# Altium PCB S100 Memory Dumper.PcbDoc
Units mil, origin at the board's own origin, x right, y up, seen from the top; angles counter-clockwise.
Board outline 10000 x 5300 mil, 2 copper layers (Top Layer, Bottom Layer); 52 components, 90 nets, 387 pads, 296 vias.
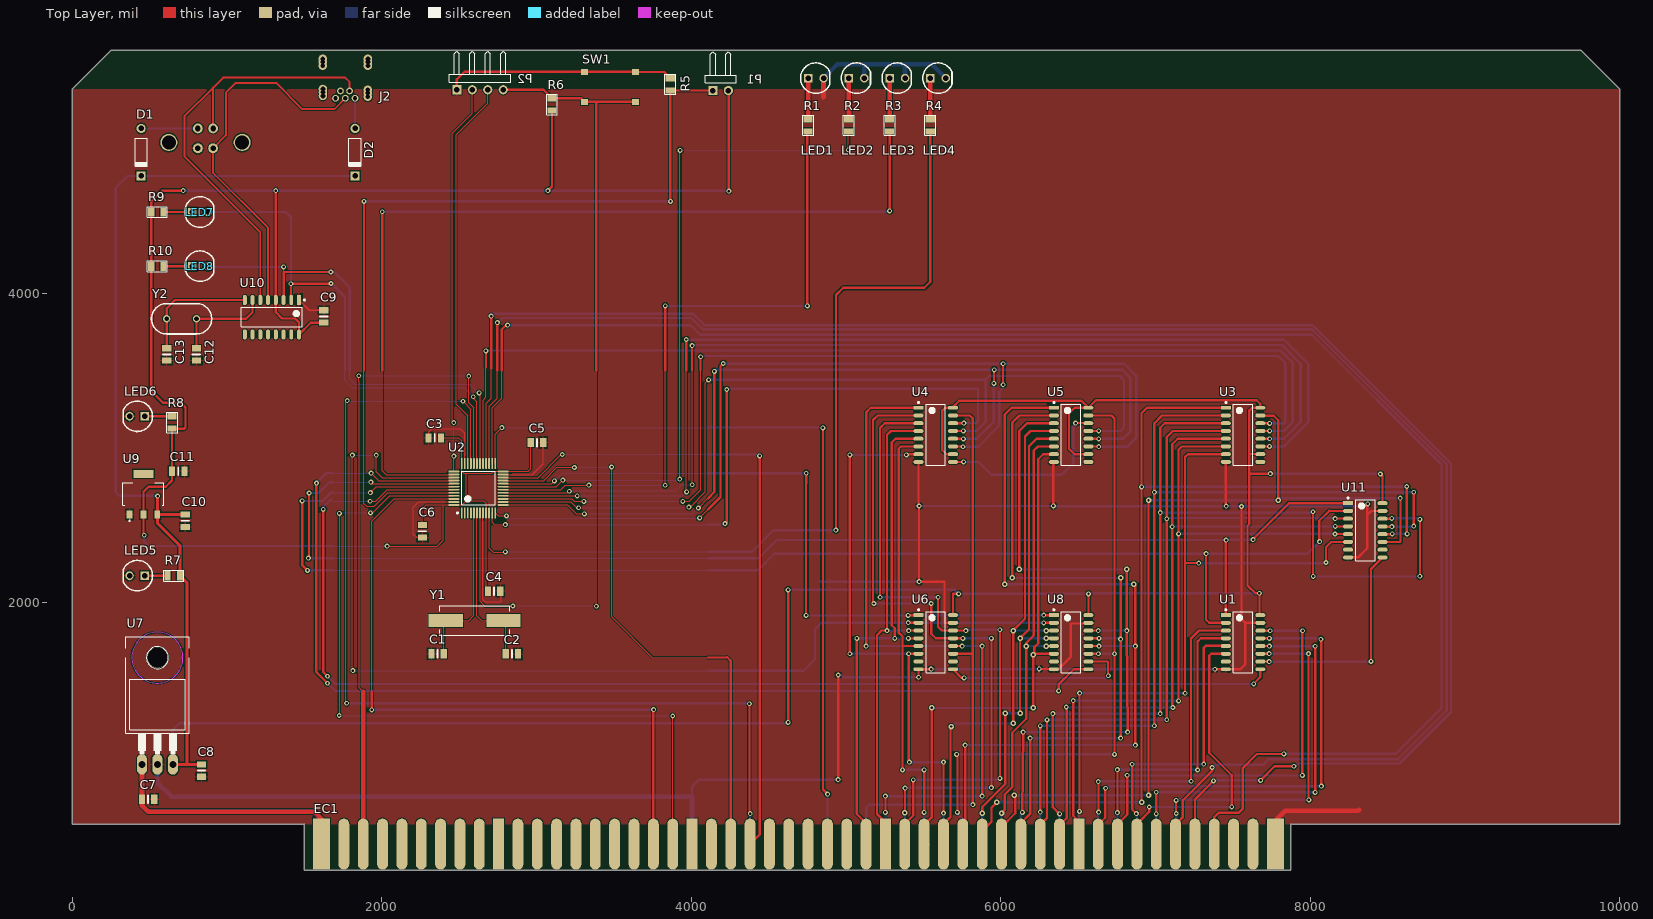
[diagram p0: Top Layer view]
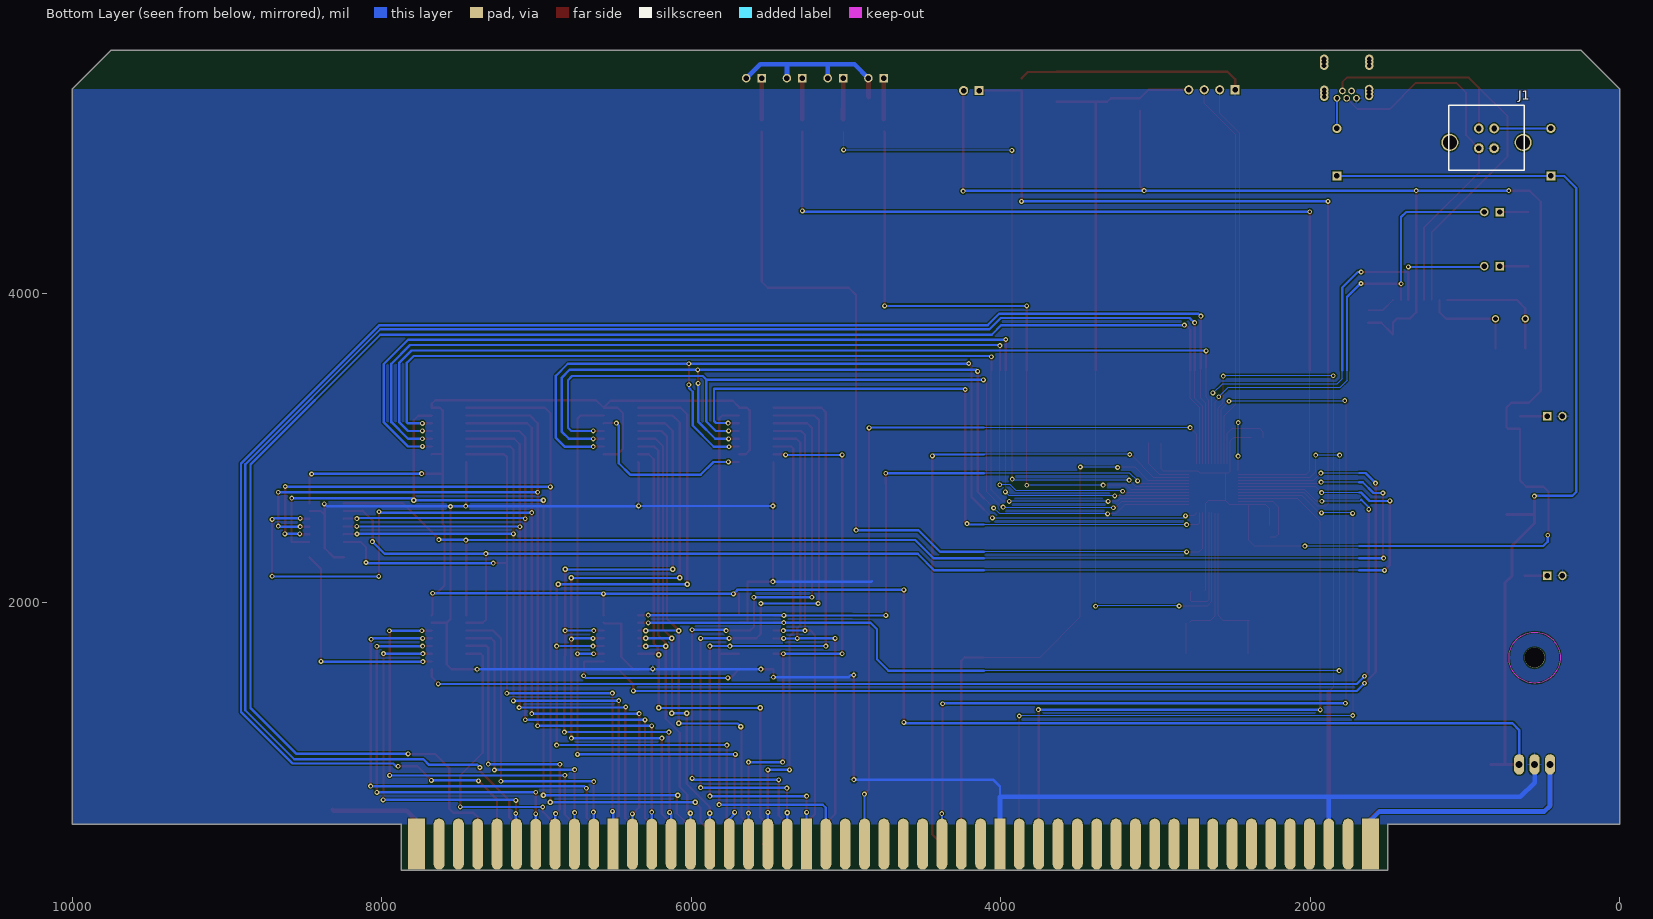
[diagram p1: Bottom Layer view, seen from below]
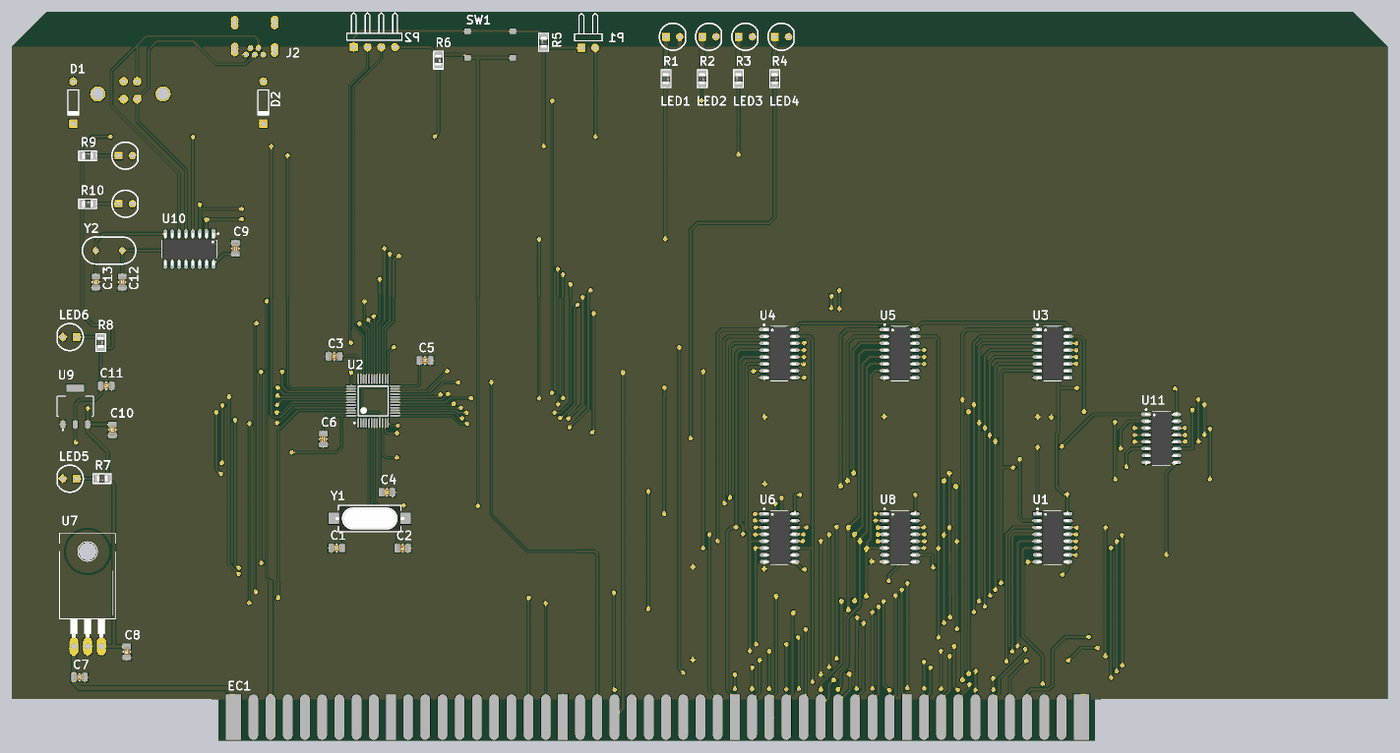
[diagram p2: 3D render of the assembled board from above, using the file's embedded part models]

## Layer stack, top to bottom
Top Solder: solder mask 0.4, Solder Resist, Dk 3.5
Top Layer: signal copper 1.4
Dielectric 1: dielectric 12.6, FR-4, Dk 4.8
Bottom Layer: signal copper 1.4
Bottom Solder: solder mask 0.4, Solder Resist, Dk 3.5

## Board outline
0,570 1500,570 1500,270 7875,270 7875,570 10000,570 10000,5320 9750,5570 250,5570 0,5320

## Design rules (kind name [scope] priority, off if disabled: settings)
Clearance [All] p1: gap=8 ignorepadtopadclearanceinfootprint=TRUE
PolygonConnect [All] p1: connectstyle=Relief reliefconductorwidth=10 reliefentries=4 polygonreliefangle="90 Angle" airgapwidth=10
RoomDefinition MCU [False] p1: confinementstyle=ConfineIn formatcopy=TRUE lockcomponents=FALSE outline 1685,3502 4108,3502 4108,1424 1685,1424
RoutingVias [All] p1: holewidth=15.75 width=31.5 viastyle="Through Hole" minholewidth=11.81 minwidth=19.68 maxholewidth=78.74 maxwidth=50
SolderMaskExpansion [All] p1: expansion=4
Width "MCU Width" [WithinRoom('MCU')] p1: maxlimit=8 minlimit=6 preferedwidth=8
Width [All] p2: maxlimit=50 minlimit=8 preferedwidth=30
30 further rules are at their usual default settings.

## Components (designator, comment, footprint, x,y, rotation, side; value= is the part's Value field where it differs from the comment)
C1 "22pF" SMD-0805C 2360.73,1670 r270 top
C2 "22pF" SMD-0805C 2840.73,1669.33 r90 top
C3 "0.10µF" SMD-0805C 2342,3065 r270 top value=0.10μF
C4 "0.10µF" SMD-0805C 2726,2075 r90 top value=0.10μF
C5 "0.10µF" SMD-0805C 3003,3035 r90 top value=0.10μF
C6 "0.10µF" SMD-0805C 2263,2462 r0 top value=0.10μF
C7 "1µF" SMD-0805C 490,730 r90 top value=1μF
C8 "1µF" SMD-0805C 835,915 r0 top value=1μF
C9 "0.10µF" SMD-0805C 1625,3850 r180 top value=0.10μF
C10 "1µF" SMD-0805C 730,2530 r0 top value=1μF
C11 "1µF" SMD-0805C 684.84,2850 r90 top value=1μF
C12 "22pF" SMD-0805C 802.13,3605 r0 top
C13 "22pF" SMD-0805C 610,3605 r0 top
D1 "Diode 1N4149" DO-35A 445,4911.46 r270 top
D2 "Diode 1N4149" DO-35A 1827.32,4911.46 r270 top
EC1 "S100 Connector" S100 1610,440 r0 top locked
J1 "USB B" "USB B V" 860.79,5065 r180 bottom
J2 "USB Mini B" "USB Mini B" 1764.33,5260 r0 top
LED1 "Generic LED 5mm" "LED 5mm THT" 4805,5390 r0 top
LED2 "Generic LED 5mm" "LED 5mm THT" 5068.33,5390 r0 top
LED3 "Generic LED 5mm" "LED 5mm THT" 5331.67,5390 r0 top
LED4 "Generic LED 5mm" "LED 5mm THT" 5595,5390 r0 top
LED5 "Generic LED 5mm" "LED 5mm THT" 419.69,2175 r180 top
LED6 "Generic LED 5mm" "LED 5mm THT" 419.69,3205 r180 top
LED7 "Generic LED 5mm" "LED 5mm THT" 825,4525 r0 top
LED8 "Generic LED 5mm" "LED 5mm THT" 825,4175 r0 top
P1 "Header 2H" HDR1X2H 4140,5310 r0 top
P2 "Header 4H" HDR1X4H 2485,5315 r0 top
R1 "330" SMD-0805-RES 4755,5085 r180 top
R2 "330" SMD-0805-RES 5018.33,5085 r180 top
R3 "330" SMD-0805-RES 5281.67,5085 r0 top
R4 "330" SMD-0805-RES 5545,5085 r180 top
R5 "10k" SMD-0805-RES 3865,5350 r0 top
R6 "1k" SMD-0805-RES 3100,5220 r180 top
R7 "680" SMD-0805-RES 655,2175 r90 top
R8 "330" SMD-0805-RES 644.84,3165 r180 top
R9 "330" SMD-0805-RES 550,4525 r270 top
R10 "330" SMD-0805-RES 550,4175 r270 top
SW1 "Button" SMD_PUSHBUTTON_LCSC 3640,5237.09 r180 top
U1 "74HC165" SOIC-175-16 7566.22,1745 r0 top
U2 "STM32F103C8T6" STM-LQFP48_N 2625,2740 r90 top
U3 "74HC595" SOIC-175-16 7566.22,3085 r0 top
U4 "74HC595" SOIC-175-16 5580,3085 r0 top
U5 "74HC595" SOIC-175-16 6455,3085 r0 top
U6 "74HC165" SOIC-175-16 5580,1745 r0 top
U7 "LM7805" LM7805-TO220 550,1205 r0 top
U8 "74HC165" SOIC-175-16 6455,1745 r0 top
U9 "AMS1117-3.3" AMS1117-3.3-SOT23 459.84,2701.69 r0 top
U10 "CH340G" SOIC-175-16 1290,3845 r270 top
U11 "74HC165" SOIC-175-16 8356,2468 r0 top
Y1 "=VALUE" "ABRACON ABLS" 2600.73,1885 r180 top
Y2 "=VALUE" THT_Crystal 802.13,3835 r180 top

## Footprints (in the part's own frame and the unit in brackets; to place one, negate y for a bottom-side part, rotate by r counter-clockwise, add the part's x,y. Pads: shape width x height; smd on the part's side, far side on the other; paste and mask are expansions set on the pad)
"ABRACON ABLS" [mm] "Crystal, 2-Leads, Body 4.70x11.40mm, Pitch 8.80mm, IPC Medium Density"
  rect 5.6x2.1 smd: 1(-4.75,0) 2(4.75,0)
  silkscreen extent -5.77,-2.42 5.78,2.42, body extent -6.35,-2.35 6.35,2.35, height 4.2
AMS1117-3.3-SOT23 [mm]
  rect 0.93x1.31 smd: 1(-2.29,-3.345) 2(0,-3.345) 3(2.29,-3.345)
  rect 3.24x1.31 smd: 4(0,3.345)
  silkscreen extent -3.36,-4.47 3.36,1.86
DO-35A [mm] "Diode, Axial; Body 4.6 x 1.9 mm (LxDia. max), Lead Dia. 0.53 mm (max)"
  round 1.5 hole 0.9: 1(-3.9,0)
  rect 1.5x1.5 hole 0.9: 2(3.9,0)
  silkscreen extent -2.3,-1 2.4,1
HDR1X2H [mm] "Connector; Header; 2 Position; Right Angle"
  rect 1.5x1.5 hole 0.9: 1(0,0)
  round 1.5 hole 0.9: 2(2.54,0)
  silkscreen extent -1.27,1.27 3.81,6.35
HDR1X4H [mm] "Connector; Header; 4 Position; Right Angle"
  rect 1.5x1.5 hole 0.9: 1(0,0)
  round 1.5 hole 0.9: 2(2.54,0) 3(5.08,0) 4(7.62,0)
  silkscreen extent -1.27,1.27 8.89,6.35
"LED 5mm THT" [mil]
  rect 55x55 hole 35.43: 1(-50,0)
  round 55 hole 35.43: 2(50,0)
  silkscreen extent -99,-99 90,99
LM7805-TO220 [mil]
  oval 66x132 hole 44: 1(-100,-250) 2(0,-250) 3(100,-250)
  round 130 hole 130 unplated: None(0,440)
  Keep-Out Layer circle w0: c0,440 r165
  Keep-Out Layer circle w0: c0,440 r165
  Keep-Out Layer circle w0: c0,440 r165
  Keep-Out Layer circle w0: c0,440 r165
  Keep-Out Layer circle w0: c0,440 r165
  Keep-Out Layer circle w0: c0,440 r165
  silkscreen extent -205,-185 205,575
S100 [mil]
  rect 110x330 smd: 1(0,0) 50(6165,0)
  oval 70x330 smd: 2(145,0) 3(270,0) 4(395,0) 5(520,0) 6(645,0) 7(770,0) 8(895,0) 9(1020,0) 11(1270,0) 12(1395,0) 13(1520,0) 14(1645,0) 15(1770,0) 16(1895,0) 17(2020,0) 18(2145,0) 19(2270,0) 21(2520,0) 22(2645,0) 23(2770,0) 24(2895,0) 25(3020,0) 26(3145,0) 27(3270,0) 28(3395,0) 29(3520,0) 31(3770,0) 32(3895,0) 33(4020,0) 34(4145,0) 35(4270,0) 36(4395,0) 37(4520,0) 38(4645,0) 39(4770,0) 41(5020,0) 42(5145,0) 43(5270,0) 44(5395,0) 45(5520,0) 46(5645,0) 47(5770,0) 48(5895,0) 49(6020,0)
  rect 70x330 smd: 10(1145,0) 20(2395,0) 30(3645,0) 40(4895,0)
  rect 110x330 smd far side: 51(0,0) 100(6165,0)
  oval 70x330 smd far side: 52(145,0) 53(270,0) 54(395,0) 55(520,0) 56(645,0) 57(770,0) 58(895,0) 59(1020,0) 61(1270,0) 62(1395,0) 63(1520,0) 64(1645,0) 65(1770,0) 66(1895,0) 67(2020,0) 68(2145,0) 69(2270,0) 71(2520,0) 72(2645,0) 73(2770,0) 74(2895,0) 75(3020,0) 76(3145,0) 77(3270,0) 78(3395,0) 79(3520,0) 81(3770,0) 82(3895,0) 83(4020,0) 84(4145,0) 85(4270,0) 86(4395,0) 87(4520,0) 88(4645,0) 89(4770,0) 91(5020,0) 92(5145,0) 93(5270,0) 94(5395,0) 95(5520,0) 96(5645,0) 97(5770,0) 98(5895,0) 99(6020,0)
  rect 70x330 smd far side: 60(1145,0) 70(2395,0) 80(3645,0) 90(4895,0)
SMD-0805-RES [mil]
  rect 60x40 smd: 1(0,40) 2(0,-40)
  silkscreen extent -35,-65 35,65, body extent -24,-39 26,39, height 31
SMD-0805C [mil]
  rect 60x40 smd: 1(0,40) 2(0,-40)
  silkscreen extent -25,0 25,0, body extent -25,-39 25,39, height 35
SMD_PUSHBUTTON_LCSC [mm]
  rect 1.15x1 smd: 1(0,0) 1(8.35,0) 2(0,-4.9) 2(8.35,-4.9)
SOIC-175-16 [mm] "SOIC, 16-Leads, Body 9.90x3.90mm, Pitch 1.27mm, IPC Low Density"
  rect 1.65x0.65 smd: 1(-2.825,4.445)
  oval 1.65x0.65 smd: 2(-2.825,3.175) 3(-2.825,1.905) 4(-2.825,0.635) 5(-2.825,-0.635) 6(-2.825,-1.905) 7(-2.825,-3.175) 8(-2.825,-4.445) 9(2.825,-4.445) 10(2.825,-3.175) 11(2.825,-1.905) 12(2.825,-0.635) 13(2.825,0.635) 14(2.825,1.905) 15(2.825,3.175) 16(2.825,4.445)
  silkscreen extent -2.95,-5 1.6,5.44, body extent -3,-5 3,5, height 1.75
STM-LQFP48_N [mm] "QFP, 48-Leads, Body 7x7mm, Pitch 0.5mm, IPC Medium Density"
  oval 1.8x0.3 smd: 1(-4.05,2.75) 2(-4.05,2.25) 3(-4.05,1.75) 4(-4.05,1.25) 5(-4.05,0.75) 6(-4.05,0.25) 7(-4.05,-0.25) 8(-4.05,-0.75) 9(-4.05,-1.25) 10(-4.05,-1.75) 11(-4.05,-2.25) 12(-4.05,-2.75) 25(4.05,-2.75) 26(4.05,-2.25) 27(4.05,-1.75) 28(4.05,-1.25) 29(4.05,-0.75) 30(4.05,-0.25) 31(4.05,0.25) 32(4.05,0.75) 33(4.05,1.25) 34(4.05,1.75) 35(4.05,2.25) 36(4.05,2.75)
  oval 0.3x1.8 smd: 13(-2.75,-4.05) 14(-2.25,-4.05) 15(-1.75,-4.05) 16(-1.25,-4.05) 17(-0.75,-4.05) 18(-0.25,-4.05) 19(0.25,-4.05) 20(0.75,-4.05) 21(1.25,-4.05) 22(1.75,-4.05) 23(2.25,-4.05) 24(2.75,-4.05) 37(2.75,4.05) 38(2.25,4.05) 39(1.75,4.05) 40(1.25,4.05) 41(0.75,4.05) 42(0.25,4.05) 43(-0.25,4.05) 44(-0.75,4.05) 45(-1.25,4.05) 46(-1.75,4.05) 47(-2.25,4.05) 48(-2.75,4.05)
  silkscreen extent -4.17,-2.75 2.75,3.57, body extent -3.5,-3.5 3.5,3.5, height 1.6
THT_Crystal [mm]
  round 1.2 hole 0.8: 1(0,0) 2(4.88,0)
  silkscreen extent -2.5,-2.5 7.38,2.5
"USB B V" [mm]
  round 1.6 hole 0.92: 1(1.25,0) 2(-1.25,0) 3(-1.25,-3.25) 4(1.25,-3.25)
  round 2.8 hole 2.3: 5(-6.02,-2.3) 5(6.02,-2.3)
  silkscreen extent -6.22,-6.86 6.22,3.81
"USB Mini B" [mm]
  round 1.1 hole 0.7: 1(1.6,0) 2(0.7,1.2) 3(0,0) 4(-0.8,1.2) 5(-1.6,0)
  round 1.4 hole 0.8: 6(-3.7,5.334) 6(-3.7,5.95) 6(-3.7,6.477) 6(-3.683,0.381) 6(-3.683,0.997) 6(-3.683,1.524) 6(3.683,0.254) 6(3.683,0.87) 6(3.683,1.397) 6(3.7,5.334) 6(3.7,5.95) 6(3.7,6.477)

## Part data
C1 C2 C12 C13: library part GQM2195C1H220GB01D, "CAP CER 22PF 50V NP0 0805", Digi-Key Part Number=490-6097-1-ND, Manufacturer="Murata Electronics North America", Operating Temperature="-55°C ~ 125°", Package / Case="0805 (2012 Metric)", Ratings=-, Temperature Coefficient="C0G, NP0", Tolerance=±2%, Voltage=50V, @ qty=0, Applications="RF, Microwave, High Frequency", Datasheets=http://www.murata.com/~/media/webrenewal/support/library/catalog/products/capacitor/mlcc/c02e.pdf, Factory Stock=0, Features="High Q, Low Loss", Height - Seated (Max)=-, Image=//media.digikey.com/Renders/Murata%20Renders/0805(GxM9).jpg, Lead Spacing=-, Lead Style=-, Minimum Quantity=1, Mounting Type="Surface Mount, MLCC", Packaging="Cut Tape (CT)", Part Number=GQM2195C1H220GB01D, Part Status=Active, Quantity Available=2356, Series=GQM, Size / Dimension="0.079\" L x 0.049\" W (2.00mm x 1.25mm)", Thickness (Max)="0.037\" (0.95mm)", Unit Price (USD)=1.26
C3 C4 C5 C6 C9: library part GCD21BR71H104KA01L, "CAP CER 0.1UF 50V X7R 0805", Digi-Key Part Number=490-11955-1-ND, Manufacturer="Murata Electronics North America", Operating Temperature="-55°C ~ 125°", Package / Case="0805 (2012 Metric)", Ratings=AEC-Q200, Temperature Coefficient=X7R, Tolerance=±10%, Voltage=50V, @ qty=0, Applications=Automotive, Datasheets=http://www.murata.com/~/media/webrenewal/support/library/catalog/products/capacitor/mlcc/c03e.ashx, Factory Stock=0, Features=-, Height - Seated (Max)=-, Image=//media.digikey.com/Renders/Murata%20Renders/0805%28GxM6%29.jpg, Lead Spacing=-, Lead Style=-, Minimum Quantity=1, Mounting Type="Surface Mount, MLCC", Packaging="Cut Tape (CT)", Part Number=GCD21BR71H104KA01L, Part Status=Active, Quantity Available=157, Series=GCD, Size / Dimension="0.079\" L x 0.049\" W (2.00mm x 1.25mm)", Thickness (Max)="0.049\" (1.25mm)", Unit Price (USD)=0.24
C7 C8 C10 C11: library part GCJ219R71C105KA01D, "CAP CER 1UF 16V X7R 0805", Digi-Key Part Number=490-5800-1-ND, Manufacturer="Murata Electronics North America", Operating Temperature="-55°C ~ 125°", Package / Case="0805 (2012 Metric)", Ratings=AEC-Q200, Temperature Coefficient=X7R, Tolerance=±10%, Voltage=16V, @ qty=0, Applications="Automotive, Boardflex Sensitive", Datasheets=http://www.murata.com/~/media/webrenewal/support/library/catalog/products/capacitor/mlcc/c03e.ashx, Factory Stock=0, Features="Soft Termination", Height - Seated (Max)=-, Image=//media.digikey.com/Renders/Murata%20Renders/0805%20(2012%20Metric)%20.85mm.jpg, Lead Spacing=-, Lead Style=-, Minimum Quantity=1, Mounting Type="Surface Mount, MLCC", Packaging="Cut Tape (CT)", Part Number=GCJ219R71C105KA01D, Part Status=Active, Quantity Available=140338, Series=GCJ, Size / Dimension="0.079\" L x 0.049\" W (2.00mm x 1.25mm)", Thickness (Max)="0.037\" (0.95mm)", Unit Price (USD)=0.29
D1 D2: "Computer Diode", Code_JEDEC=DO-204-AH, ComponentLink1Description="Manufacturer Link", ComponentLink1URL=http://www.national.com/, DatasheetVersion=1989, LatestRevisionDate=17-Jul-2002, LatestRevisionNote="Re-released for DXP Platform.", PackageDescription="Diode, Axial; Body 4.6 x 1.9 mm (LxDia. max), Lead Dia. 0.53 mm (max)", PackageReference=DO-35A, PackageVersion=1989, Published=8-Jun-2000, Publisher="Altium Limited"
J2: "MINI USB A - 5POS Horizontal through hole", Package=None, Availability=Good, MF="Wurth Electronics", MP=651005136521, Price="1.78 USD", SnapEDA_Link=https://www.snapeda.com/symbols-footprints/651005136521/Wurth%20Electronics%20Inc/view-part/?ref=snap
P1: "Header, 2-Pin, Right Angle", LatestRevisionDate=17-Jul-2002, LatestRevisionNote="Re-released for DXP Platform.", Publisher="Altium Limited"
P2: "Header, 4-Pin, Right Angle", LatestRevisionDate=17-Jul-2002, LatestRevisionNote="Re-released for DXP Platform.", Publisher="Altium Limited"
R1 R2 R3 R4 R8 R9 R10: library part ERJ-6ENF3300V, "RES SMD 330 OHM 1% 1/8W 0805", Digi-Key Part Number=P330CCT-ND, Manufacturer="Panasonic Electronic Components", Operating Temperature="-55°C ~ 155°", Package / Case="0805 (2012 Metric)", Power (Watts)="0.125W, 1/8W", Supplier Device Package=0805, Temperature Coefficient=±100ppm/°, Tolerance=±1%, @ qty=1500, Composition="Thick Film", Datasheets=http://industrial.panasonic.com/www-cgi/jvcr13pz.cgi?E+PZ+3+AOA0002+ERJ6ENF3300V+7+WW, Factory Stock=0, Failure Rate=-, Features="Automotive AEC-Q200", Height - Seated (Max)="0.028\" (0.70mm)", Image=//media.digikey.com/Renders/Panasonic%20Renders/ERJ-0805%20Pkg.jpg, Minimum Quantity=1, Number of Terminations=2, Packaging="Cut Tape (CT)", Part Number=ERJ-6ENF3300V, Part Status=Active, Quantity Available=297770, Series=ERJ, Size / Dimension="0.079\" L x 0.049\" W (2.00mm x 1.25mm)", Unit Price (USD)=0.00729
R5: library part ERJ-P06F1002V, "RES SMD 10K OHM 1% 1/2W 0805", Digi-Key Part Number=P16059CT-ND, Manufacturer="Panasonic Electronic Components", Operating Temperature="-55°C ~ 155°", Package / Case="0805 (2012 Metric)", Power (Watts)="0.5W, 1/2W", Supplier Device Package=0805, Temperature Coefficient=±100ppm/°, Tolerance=±1%, @ qty=1500, Composition="Thick Film", Datasheets=https://industrial.panasonic.com/cdbs/www-data/pdf/RDA0000/AOA0000C243.pdf, Factory Stock=0, Failure Rate=-, Features="Automotive AEC-Q200, Pulse Withstanding", Height - Seated (Max)="0.028\" (0.70mm)", Image=//media.digikey.com/Renders/Panasonic%20Renders/ERJ-0805%20Pkg.jpg, Minimum Quantity=1, Number of Terminations=2, Packaging="Cut Tape (CT)", Part Number=ERJ-P06F1002V, Part Status=Active, Quantity Available=42054, Series=ERJ, Size / Dimension="0.079\" L x 0.049\" W (2.00mm x 1.25mm)", Unit Price (USD)=0.02534
R6: library part ERJ-P06F1001V, "RES SMD 1K OHM 1% 1/2W 0805", Digi-Key Part Number=P16058CT-ND, Manufacturer="Panasonic Electronic Components", Operating Temperature="-55°C ~ 155°", Package / Case="0805 (2012 Metric)", Power (Watts)="0.5W, 1/2W", Supplier Device Package=0805, Temperature Coefficient=±100ppm/°, Tolerance=±1%, @ qty=1500, Composition="Thick Film", Datasheets=https://industrial.panasonic.com/cdbs/www-data/pdf/RDA0000/AOA0000C243.pdf, Factory Stock=0, Failure Rate=-, Features="Automotive AEC-Q200, Pulse Withstanding", Height - Seated (Max)="0.028\" (0.70mm)", Image=//media.digikey.com/Renders/Panasonic%20Renders/ERJ-0805%20Pkg.jpg, Minimum Quantity=1, Number of Terminations=2, Packaging="Cut Tape (CT)", Part Number=ERJ-P06F1001V, Part Status=Active, Quantity Available=161264, Series=ERJ, Size / Dimension="0.079\" L x 0.049\" W (2.00mm x 1.25mm)", Unit Price (USD)=0.02534
R7: library part ERJ-6ENF6800V, "RES SMD 680 OHM 1% 1/8W 0805", Digi-Key Part Number=P680CCT-ND, Manufacturer="Panasonic Electronic Components", Operating Temperature="-55°C ~ 155°", Package / Case="0805 (2012 Metric)", Power (Watts)="0.125W, 1/8W", Supplier Device Package=0805, Temperature Coefficient=±100ppm/°, Tolerance=±1%, @ qty=1500, Composition="Thick Film", Datasheets=http://industrial.panasonic.com/www-cgi/jvcr13pz.cgi?E+PZ+3+AOA0002+ERJ6ENF6800V+7+WW, Factory Stock=0, Failure Rate=-, Features="Automotive AEC-Q200", Height - Seated (Max)="0.028\" (0.70mm)", Image=//media.digikey.com/Renders/Panasonic%20Renders/ERJ-0805%20Pkg.jpg, Minimum Quantity=1, Number of Terminations=2, Packaging="Cut Tape (CT)", Part Number=ERJ-6ENF6800V, Part Status=Active, Quantity Available=63553, Series=ERJ, Size / Dimension="0.079\" L x 0.049\" W (2.00mm x 1.25mm)", Unit Price (USD)=0.00729
SW1: "LCSC Push button SMD"
U2: "ARM Cortex-M3 32-bit MCU, 64 KB Flash, 20 KB Internal RAM, 37 I/Os, 48-pin LQFP, -40 to 85 degC, Tray", I/Os (High Current)=37, Operating Frequency(F) (Processor speed) (MHz)=72, Supplier Part Number 1=497-6063-ND, Supply Voltage(Vcc) min (V)=2, A/D Converter="2x12-bit (10 Channel)", ComponentLink1Description="Manufacturer URL", ComponentLink1URL=http://www.st.com/web/en/home.html, ComponentLink2Description=Datasheet, ComponentLink2URL=http://www.st.com/st-web-ui/static/active/en/resource/technical/document/datasheet/CD00161566.pdf, ComponentLink3Description="Package Specification", ComponentLink3URL=http://www.st.com/st-web-ui/static/active/en/resource/technical/document/datasheet/DM00058181.pdf, Core="ARM Cortex-M3", DatasheetVersion="Rev. 16", FLASH Size (Prog) (kB)=64, Internal RAM Size (kB)=20, Mounting Technology="Surface Mount", PackageDescription="48-Pin Low Profile Quad Flat Package, 7 x 7 mm Body, 0.5 mm Pitch", PackageReference=LQFP48, PackageVersion="Rev. 6, 06/2013", Packing=Tray, PartNumber=STM32F103C8T6, Supplier 1=Digi-Key, Supplier 2=Farnell, Supplier 3=Newark, Supplier 4=Newark, Supplier 5=Mouser, Supplier Part Number 2=1447637, Supplier Part Number 3=59M2182, Supplier Part Number 4=57P1222, Supplier Part Number 5=511-STM32F103C8T6
U7: "LM7805 Linear Voltage Regulator"
U9: "Sot223/Pkg 1-Amp 3.3-Volt Low Drop Out Voltage Regulatator", Package=None, Availability=Unavailable, MF="Advanced Monolithic Systems", MP=AMS1117-3.3, Price=None, SnapEDA_Link=https://www.snapeda.com/parts/AMS1117-3.3/Advanced%20Monolithic%20Systems/view-part/?ref=snap
Y1: library part "Abracon Crystal ABLS", "SMT Crystal"
Y2: library part "THT Crystal", "SMT Crystal"

## Via types
v1: diameter 31.5, hole 15.75, Top Layer to Bottom Layer, 268 vias
v2: diameter 35.43, hole 15.75, Top Layer to Bottom Layer, 28 vias

## Nets (pads, with @x,y where several pads share a name; then routed paths per layer and width w, separated by ;. In a path a pad name is that pad's centre, name@x,y a point inside that pad or via, vN(x,y) a via of type N, cw(c..) or ccw(c..) an arc to the next point about the centre after c; other vN are vias at no path point)
+3V3: C3.1 C4.1 C5.1 C6.1 C9.1 C11.1 P1.2 R6.1 R8.1 R9.2 R10.2 U2.9 U2.24 U2.36 U2.48 U9.2 U10.4 U10.16 | length 13212.1
  Top Layer w8: v1(2034,2366) 2360,2366 2398,2404 2398,2631.73 ; C6.1 2263,2608 2286.73,2631.73 2398,2631.73 ; C3.1 2384,3067 2495,3067 2516.73,3045.27 U2.36 2516.73,2850.27 2531,2836 2542,2836 ; C4.1 2674.21,2086.79 U2.9 2674.21,2642.28 2658.5,2658 2545,2658 ; C5.1 2963,2866 2945.27,2848.27 U2.24 2723.27,2848.27 2711,2836 2542,2836 ; 2398,2631.73 U2.48 2518.73,2631.73 2545,2658 ; 2542,2836 2545,2833 2545,2658
  Top Layer w15: v1(465,2436) 459.84,2441.16 U9.2 459.84,2716.84 492,2749 604,2749 644.84,2789.84 C11.1 R8.1 723,3125 731,3133 731,3261 700,3292 587,3292 510,3369 R10.2 R9.2 510,4591 582,4663 v1(717,4663) ; v1(1315,4663) U10.4 1315,3878 1356,3837 1439,3837 1465,3811 U10.16 1541.22,3810 C9.1 ; v1(3073,4663) 3100,4690 R6.1 ; P1.2 4243,5307 v1(4243,4660)
  Bottom Layer w8: 1685,2366 v1(2034,2366)
  Bottom Layer w15: v1(465,2436) 465,2395 494,2366 1685,2366 ; v1(717,4663) v1(1315,4663) v1(3073,4663) 4240,4663 v1(4243,4660)
+5: C8.1 C10.1 D1.2 D2.2 R7.2 U1.16 U3.10 U3.16 U4.10 U4.16 U5.10 U5.16 U6.16 U7.3 U8.16 U9.3 U11.16 | length 20018.6
  Top Layer w15: v1(4626,1227) v1(4626,2083) ; U6.16 5691.22,2057 v1(5728,2057) ; U4.10 5648,2960 5623,2985 5623,3243 5640,3260 U4.16 5691.22,3264.22 5732,3305 6522,3305 6566.22,3260.78 U5.16 ; U8.16 6567,1920.78 v1(6567,2057) ; U5.10 6476,2960 6441,2995 6441,3224 6477,3260 U5.16 ; U1.16 7672,1925.44 v1(7672,2061) 7646,2061 7595,2112 7595,2498 7607,2510 7607,2834 ; U3.10 7676.44,2961 7607,2961 ; v1(7743,2834) 7607,2834 ; v1(8454,2832) 8467.22,2818.78 U11.16 ; U5.16 6615.22,3309 7654,3309 7677.44,3285.56 U3.16 7624,3260 7607,3243 7607,2961 ; 7607,2834 7607,2961
  Top Layer w20: v1(551,2689) 551,2571 U9.3 ; U7.3 741,955 ; C10.1 U9.3 ; C8.1 741,955 ; U9.3 550,2515 695,2370 R7.2 741,2129 741,955
  Bottom Layer w15: v1(551,2689) 548,2692 305,2692 281,2716 281,4680 358.91,4757.91 D1.2 D2.2 ; U7.3 650,1178 694,1222 4621,1222 v1(4626,1227) ; v1(4626,2083) 4627,2084 4825,2084 4826,2083 5702,2083 v1(5728,2057) v1(6567,2057) 6571,2061 v1(7672,2061) ; v1(7743,2834) 8452,2834 v1(8454,2832)
+8_UR: C7.1 EC1.1 EC1.51 U7.1 | length 3245.7
  Top Layer w30: U7.1 C7.1 450,690 490,650 1565,650 1610,605 EC1.1
  Bottom Layer w30: U7.1 450,689 488,651 1555,651 1610,596 EC1.51
\ADDR_IN_LD: U2.20 U6.1 U8.1 | length 4579.6
  Top Layer w8: U2.20 3097.53,2769.53 v1(3115,2787)
  Top Layer w15: v1(4742,1918) 4742,2769 4743,2770 v1(4743,2837) ; v1(5401,1918) 5403,1920 U6.1 ; v1(6277.8,1920) 6339.78,1920 6341.78,1918 U8.1
  Bottom Layer w8: v1(3115,2787) 3165,2837 4108,2837
  Bottom Layer w15: 4108,2837 v1(4743,2837) ; v1(4742,1918) 4743,1917 4957,1917 4958,1918 v1(5401,1918) 5403,1920 v1(6277.8,1920)
\ADDR_OUT_OE: U2.14 U4.13 U5.13 | length 5857.2
  Top Layer w8: U2.14 3221.58,2651.42 3259,2614 v1(3272,2614) ; v1(3985,2618) 3991,2624 4000,2624 4092,2716 4092,3420 v1@4108,3436
  Top Layer w15: v1@4108,3436 v1(4112,3440) ; U4.13 v1(5759,3110) ; U5.13 v1(6633,3110)
  Bottom Layer w8: v1(3272,2614) 3981,2614 v1(3985,2618)
  Bottom Layer w15: v1(4112,3440) 4113,3441 5903,3441 5903,3171 5842,3110 v1(5759,3110) ; 5903,3442 5926,3465 6770,3465 6797,3438 6797,3131 6776,3110 v1(6633,3110)
\ADSB: EC1.22 U2.21 | length 3777.2
  Top Layer w8: U2.21 3047.21,2789.21 3132,2874 v1(3245,2874) ; v1(3485,2877) 3485,1910 3749,1646 4108,1646
  Top Layer w15: 4108,1646 4231,1646 4232,1647 4255,1624 EC1.22
  Bottom Layer w8: v1(3245,2874) 3482,2874 v1(3485,2877)
\CC_DSB: EC1.19 U2.45 | length 5071.3
  Top Layer w8: v1(1725,1271) v1@1725,2577 ; v1(1927,2581) 1943,2581 2052.79,2690.79 U2.45 ; EC1.19 v1(3880,1268)
  Bottom Layer w8: v1(1725,1271) 1726,1270 3878,1270 v1(3880,1268) ; v1@1730,2581 v1(1927,2581)
  other v1: 1726,2577
\DI_LD: U1.1 U2.41 U11.1 | length 8748.4
  Top Layer w8: v1(1930,2779) 1939.47,2769.53 U2.41
  Top Layer w15: v1(1526,2288) 1530,2292 v1(1530,2709) ; U1.1 7455,2404 v1(7456,2405) ; v1@7625,2405 7863,2643 U11.1
  Bottom Layer w8: 1685,2288 4108,2288 ; 1685,2779 v1(1930,2779)
  Bottom Layer w15: v1(1526,2288) 1685,2288 ; v1(1530,2709) 1591,2709 1661,2779 1685,2779 ; 4108,2288 4435,2288 4552,2405 v1(7456,2405) ; v1@7456,2408 v1(7631,2408)
\DO_OE: U2.29 U3.13 | length 6599.8
  Top Layer w8: U2.29 2654.53,3308.54 2672.5,3326.51 2672.5,3520.5 2673,3521
  Top Layer w15: 2673,3521 v1(2673,3627) ; U3.13 v1(7738,3110)
  Bottom Layer w15: v1@2673,3629.64 7807.36,3629.64 7888,3549 7888,3167 7831,3110 v1(7738,3110)
\DODSB: EC1.23 U2.22 | length 4257.7
  Top Layer w8: U2.22 3009.9,2808.9 3159,2958 v1(3166,2958)
  Top Layer w15: EC1.23 4442,502 v1(4442,2949)
  Bottom Layer w8: v1(3166,2958) 4108,2958
  Bottom Layer w15: 4108,2958 4433,2958 v1(4442,2949)
\INT: EC1.73 U2.33 | length 6653.5
  Top Layer w8: v1(1773,1350) 1777,1354 1766.25,1364.75 1766.25,3295.25 v1(1777,3306) ; v1(2525,3302) 2575.79,3251.21 U2.33
  Top Layer w15: v1(4376,1347) 4376,642 v1(4381,637)
  Bottom Layer w8: v1(1777,3306) 1781,3302 v1(2525,3302)
  Bottom Layer w15: v1(1773,1350) 4373,1350 v1(4376,1347) ; EC1.73 4380,636 v1(4381,637)
\MCU_RST: P2.4 R6.2 SW1.1 U2.7 | length 5486.5
  Top Layer w8: U2.7 2634.84,2008.16 2666,1977 2845,1977 v1(2847,1979) ; v1(3387,1977) 3387,3502
  Top Layer w15: P2.4 3045,5315 R6.2 3288.35,5260 3311.26,5237.09 3387,5237.09 ; 3387,3502 3387,5237.09 ; SW1.1@3640,5237.09 3387,5237.09
  Bottom Layer w8: v1(2847,1979) 3385,1979 v1(3387,1977)
\SDSB: EC1.18 U2.46 | length 4504.2
  Top Layer w8: 1935,1424 1935,2525 2081.1,2671.1 U2.46 U2.46@2463.77,2672.88
  Top Layer w15: v1(1935,1307) 1935,1424 ; EC1.18 3755,1307 v1(3757,1309)
  Bottom Layer w15: v1(1935,1307) 1937,1309 v1(3757,1309)
A0: EC1.79 U4.15 U6.11 | length 3694.1
  Top Layer w15: U6.11 5820,1670 ; U4.15 5800,3210 5820,3190 5820,1670 ; v1(5820,695) 5820,1670
  Bottom Layer w15: EC1.79 5130,675 5150,695 v1(5820,695)
A1: EC1.80 U4.1 U6.12 | length 4575
  Top Layer w15: v1(5130,1720) 5130,3230 5160,3260 U4.1 ; v1(5255,645) v1(5255,750) ; U6.12 v1(5750,1720) ; v1(5880,750) v1(5880,1720)
  Bottom Layer w15: v1(5130,1720) v1(5750,1720) v1(5880,1720) ; EC1.80 v1(5255,645) ; v1(5255,750) v1(5880,750)
A2: EC1.81 U4.2 U6.13 | length 4367.2
  Top Layer w15: v1(5180,1995) 5175,1990 5175,3180 5205,3210 U4.2 ; v2(5380,643.33) 5381.67,645 v1(5381.67,801.67) ; v1(5550,1995) 5550,1800 5580,1770 U6.13 v1(5755,1770) ; v1(5940,805) v1(5940,1770)
  Bottom Layer w15: v1@5175,1990 v1(5180,1995) v1(5550,1995) ; EC1.81 v2(5380,643.33) v2@5381.67,645 ; v1(5381.67,801.67) 5385,805 v1(5940,805) ; v1(5755,1770) v1(5940,1770)
A3: EC1.31 U4.3 U6.14 | length 4312.8
  Top Layer w15: v1(5220,2035) 5220,3130 5250,3160 U4.3 ; EC1.31 5380,570 5435,625 v1(5435,855) ; v1(5595,2035) 5595,1845 5620,1820 U6.14 v1(5775,1820) v1@5770,1825 ; v1(5995,865) 5994.78,865.22 5994.78,1824.78 v1(5995,1825)
  Bottom Layer w15: v1(5220,2035) v1(5595,2035) ; v1(5435,855) 5985,855 v1(5995,865) ; v1(5775,1820) 5770,1825 v1(5995,1825)
A4: EC1.30 U4.4 U6.3 | length 3133.1
  Top Layer w15: EC1.30 5255,580 5200,635 5200,1790 5230,1820 v1(5265,1820) 5265,3085 5290,3110 U4.4 ; v1(5405,1820) U6.3
  Bottom Layer w15: v1(5265,1820) v1(5405,1820)
A5: EC1.29 U4.5 U6.4 | length 3215.9
  Top Layer w15: v1(5070,1770) 5070,635 5130,575 EC1.29 ; v1(5315,1770) 5315,1835 5295,1855 5295,3035 5320,3060 U4.5 ; v1(5403,1769) 5469.78,1769 U6.4
  Bottom Layer w15: v1(5070,1770) v1(5315,1770) 5314,1769 v1(5403,1769)
A6: EC1.82 U4.6 U6.5 | length 2944.1
  Top Layer w15: v1(5365,920) 5365,1720 ; U6.5 5365,1720 ; U4.6 5355,3010 5340,2995 5340,1808.28 5365,1783.28 5365,1720 ; v1(5505,645) v1(5505,920)
  Bottom Layer w15: v1(5365,920) v1(5505,920) ; EC1.82 v1(5505,645)
A7: EC1.83 U4.7 U6.6 | length 3650.8
  Top Layer w15: v1(5025,1670) v1(5025,2955) ; v1(5390,2955) 5395,2960 U4.7 ; v1(5410,970) 5405,965 v1(5405,1670) U6.6 ; v1(5630,640) v1(5630,970)
  Bottom Layer w15: v1(5025,1670) v1(5405,1670) ; v1(5025,2955) v1(5390,2955) v1@5395,2960 ; v1@5405,965 v1(5410,970) v1(5630,970) ; EC1.83 v1(5630,640)
A8: EC1.84 U5.15 U8.11 | length 4133.9
  Top Layer w15: v1(5715,1020) 5720,1015 v1(5720,645) ; U8.11 6566.89,1669.33 6630,1669.33 v1(6630.67,1670) ; U5.15 6715,3210 6735,3190 v1(6735,1670) v1(6735,1020)
  Bottom Layer w15: v1(5715,1020) v1(6735,1020) ; v1(5720,645) 5720,635 5755,600 EC1.84 ; v1@6630,1669.33 v1(6630.67,1670) v1(6735,1670)
A9: EC1.34 U5.1 U8.12 | length 5397.4
  Top Layer w15: EC1.34@5735,440 EC1.34 5775,440 5770,445 v1(5770,1080) ; v2(6025,2120) 6025,3215 6070,3260 U5.1 ; U8.12 v1(6635,1720) ; v2(6860,2120) 6870,2110 v1(6870,1720) v1(6870,1080)
  Bottom Layer w15: v1(5770,1080) v1(6870,1080) ; v2(6025,2120) v2(6860,2120) ; v1(6635,1720) v1(6870,1720)
A10: EC1.37 U5.2 U8.13 | length 4562.6
  Top Layer w15: v2(6075,2160) 6075,3164 6121,3210 U5.2 ; EC1.37 6130,575 6190,635 v1(6190,1125) ; U8.13 v1(6635,1770) ; 6775,1155 v1(6775,1125) 6774.78,1169.59 6775,1169.8 v1(6775,1765) v2(6775,2160)
  Bottom Layer w15: v2(6075,2160) v2(6775,2160) ; v1(6190,1125) v1(6775,1125) ; v1(6635,1770) 6770,1770 v1(6775,1765)
A11: EC1.87 U5.3 U8.14 | length 4538.9
  Top Layer w15: v2(6119,2215) 6119,3109 6170,3160 U5.3 ; v1(6140,645) v1(6145,1164.18) ; U8.14 v1(6630,1820) ; v2(6815,2215) v1(6815,1820) v1(6820,1164.18)
  Bottom Layer w15: v2(6119,2215) v2(6815,2215) ; EC1.87 6130,635 v1(6140,645) ; v1(6145,1164.18) v1(6820,1164.18) ; v1(6630,1820) v1(6815,1820)
A12: EC1.33 U5.4 U8.3 | length 3540.4
  Top Layer w15: EC1.33 5630,570 5675,615 5675,1195 v2(5680,1200) ; v2(6080,1220) v2(6080,1820) 6157,1897 6157,3074 6193,3110 U5.4 ; v2(6295,1820) U8.3
  Bottom Layer w15: v2(5680,1200) 5700,1220 v2(6080,1220) ; v2(6080,1820) v2(6295,1820)
A13: EC1.85 U5.5 U8.4 | length 3152
  Top Layer w15: v2(5880,640) 5880,680 6030,830 v2(6030,1285) ; v2(6125,1285) v2(6125,1770) 6183,1828 6183,3011 6232,3060 U5.5 ; v2(6295,1770) U8.4
  Bottom Layer w15: EC1.85 v2(5880,640) ; v2(6030,1285) v2(6125,1285) ; v2(6125,1770) v2(6295,1770)
A14: EC1.86 U5.6 U8.5 | length 2954
  Top Layer w15: v2(6005,640) 6025,660 6025,759 6075,809 6075,1160 6165,1250 v2(6165,1720) 6165,1740 6213,1788 6213,2983 6240,3010 U5.6 ; v2(6295,1720) U8.5
  Bottom Layer w15: EC1.86 v2(6005,640) ; v2(6165,1720) 6275,1720 6280,1715 6285,1720 v2(6295,1720)
A15: EC1.32 U5.7 U8.6 | length 3449.7
  Top Layer w15: EC1.32@5535,440 EC1.32 5505,565 5555,615 v2(5555,1320) ; v2(6210,1320) v2(6210,1664.33) v2@6215.67,1670 ; U8.6 v2@6215.67,1670 ; U5.7 6275,2960 6242,2927 6242,1737 6215.67,1710.67 v2@6215.67,1670
  Bottom Layer w15: v2(5555,1320) 5555.22,1320.22 6209.78,1320.22 v2(6210,1320)
ADDR_IN: U2.40 U8.9 | length 7291.9
  Top Layer w8: v1(1931,2838) 1931,2837 1978.79,2789.21 U2.40
  Top Layer w15: v1(1578,2773) 1578,2777 1577,2778 1577,1552 v1(1649,1480) ; v1(6374,1430) 6374,1472 6472,1570 U8.9
  Bottom Layer w8: 1685,2838 v1(1931,2838)
  Bottom Layer w15: v1@1580,2771 v1(1578,2773) 1643,2838 1685,2838 ; v1(1649,1480) 1699,1430 v1(6374,1430)
ADDR_IN_CLK: U2.39 U6.2 U8.2 | length 7012.4
  Top Layer w8: v1(1810,2954) 1810,1564 v1(1813,1561) ; v1(1964,2954) 1964,2848 2003.1,2808.9 U2.39
  Top Layer w15: v1(5402,1871) 5403,1870 U6.2 ; v1(6278,1870) U8.2
  Bottom Layer w8: v1(1810,2954) v1(1964,2954) ; v1(1813,1561) 4108,1561
  Bottom Layer w15: 4108,1561 4726,1561 4800,1635 4800,1829 4842,1871 v1(5402,1871) 6277,1871 v1(6278,1870)
ADDR_OUT_RCLK: U2.13 U4.12 U5.12 | length 6225.6
  Top Layer w8: U2.13 3199.27,2631.73 3257,2574 v1(3309,2574) ; v1(4046,2612) 4108,2674
  Top Layer w15: 4108,2674 4149,2715 v1(4149,3495) ; U4.12 5758,3060 v1(5759,3059) ; v1(5956,3417) 5956,3503 v1(5958,3505) ; U5.12 6632,3060 v1(6633,3059)
  Bottom Layer w8: v1(3309,2574) 4008,2574 v1(4046,2612)
  Bottom Layer w15: v1(4149,3495) 4159,3505 v1(5958,3505) 6786,3505 6836,3455 6836,3104 6791,3059 v1(6633,3059) ; v1(5759,3059) 5845,3059 5954,3168 5954,3415 v1(5956,3417)
ADDR_OUT_SER: U2.11 U4.14 | length 4448.2
  Top Layer w8: U2.11 2713.58,2519.42 2728,2505 v1(2799,2505)
  Top Layer w15: v1(4218,2511) 4229,2522 v1(4229,3378) ; U4.14 5761,3160 v1(5762,3161)
  Bottom Layer w8: v1(2799,2505) 4108,2505
  Bottom Layer w15: 4108,2505 4212,2505 v1(4218,2511) ; v1(4229,3378) 4234,3383 5853,3383 5853,3174 5840,3161 v1(5762,3161)
ADDR_OUT_SRCLK: U2.12 U4.11 U5.11 | length 6598.4
  Top Layer w8: U2.12 2752.82,2561 v1(2806,2561) ; v1(4054,2548) 4108,2602
  Top Layer w15: 4108,2602 4189,2683 4189,3528 v1(4207,3546) ; U4.11 5754,3010 v1(5756,3008) ; v1(6015,3409) v1(6015,3544) ; U5.11 6632,3010 v1(6633,3009)
  Bottom Layer w8: v1(2806,2561) 2820.75,2546.25 4052.25,2546.25 v1(4054,2548)
  Bottom Layer w15: v1(4207,3546) 4209,3544 v1(6015,3544) 6798,3544 6875,3467 6875,3065 6819,3009 v1(6633,3009) ; v1(5756,3008) 5854,3008 5991,3145 5991,3363 6015,3387 v1(6015,3409)
DI: U1.9 U2.43 | length 8120.4
  Top Layer w8: v1(1925,2656) 1961.79,2656 2035.94,2730.16 U2.43
  Top Layer w15: v1(1622,2603) 1622,1552 v1(1649,1525) ; v1(7635,1475) 7635,1477 7677.44,1519.44 U1.9
  Bottom Layer w8: 1670,2665 1679,2656 v1(1925,2656)
  Bottom Layer w15: v1(1622,2603) 1622,2617 1670,2665 ; v1(1649,1525) 1699,1475 4917,1475 v1(7635,1475)
DI0: EC1.95 U1.11 | length 2402.1
  Top Layer w15: v1(7133,723) 7133,639 v1(7134,638) ; U1.11 7733,1670 v1(7734,1671) ; v1(7989,1671) 7989,728 v1(7991,726)
  Bottom Layer w15: EC1.95 7134,444 v1(7134,638) ; v1(7133,723) 7136,726 v1(7991,726) ; v1(7734,1671) v1(7989,1671)
DI1: EC1.94 U1.12 | length 2662.4
  Top Layer w15: v1(7005,635) v1(7005,775) ; U1.12 v1(7736,1720) ; v1(8032,774) v1(8032,1719)
  Bottom Layer w15: EC1.94 v1(7005,635) ; v1(7005,775) 8031,775 v1(8032,774) ; v1(7736,1720) 7737,1719 v1(8032,1719)
DI2: EC1.41 U1.13 | length 3125
  Top Layer w15: EC1.41 6630,565 6676,611 6676,799 v1(6678,801) ; U1.13 v1(7736,1770) ; v1(8069,1764) 8072,1761 v1(8072,815)
  Bottom Layer w15: v1(6678,801) 6691.75,814.75 8071.75,814.75 v1(8072,815) ; v1(7736,1770) 8063,1770 v1(8069,1764)
DI3: EC1.42 U1.14 | length 2812.9
  Top Layer w15: EC1.42 6755,569 6817,631 v1(6817,885) ; U1.14 7678.44,1819 v1(7741,1819) ; v1(7949,884) 7949,1817 v1(7951,1819)
  Bottom Layer w15: v1(6817,885) 6818,884 v1(7949,884) ; v1(7741,1819) v1(7951,1819)
DI4: EC1.91 U1.3 | length 2175.6
  Top Layer w15: v1(6630,844) 6632,842 v1(6632,647) ; v1(7230,846) 7230,1769 7281,1820 U1.3
  Bottom Layer w15: EC1.91 6630,645 v1(6632,647) ; v1(6630,844) 6632,846 v1(7230,846)
DI5: EC1.92 U1.4 | length 2022.5
  Top Layer w15: v1(6754,643.33) v1(6754,921) ; v1(7272,919) 7272,1750 7292,1770 U1.4
  Bottom Layer w15: v1(6754,643.33) 6755,642.33 EC1.92 ; v1(6754,921) 7270,921 v1(7272,919)
DI6: EC1.93 U1.5 | length 1892.1
  Top Layer w15: v1(6849,956) 6849,665 v1(6877,637) ; v1(7312,957) 7312,1708 7325,1721 7454,1721 U1.5
  Bottom Layer w15: v1(6849,956) 7311,956 v1(7312,957) ; v1(6877,637) 6880,634 EC1.93
DI7: EC1.43 U1.6 | length 1955
  Top Layer w15: EC1.43 6880,536 6900,556 6900,590 6960,650 v1(6960,680) ; U1.6 7361,1670 7348,1657 7348,1030 7493,885 v1(7493,681)
  Bottom Layer w15: v1(6960,680) 7492,680 v1(7493,681)
DI_CLK: U1.2 U2.42 U11.2 | length 9013.6
  Top Layer w8: v1(1926,2712) 1963.84,2749.84 U2.42
  Top Layer w15: v1(1485,2658) 1485,2244 v1(1520,2209) ; v1(7327,2317) 7327,1890 7347,1870 U1.2 ; v1(8061,2395) 8059,2397 8059,2530 8124,2595 8126,2593 U11.2
  Bottom Layer w8: 1685,2209 4108,2209 ; 1685,2712 v1(1926,2712)
  Bottom Layer w15: v1(1485,2658) 1486,2657 1616,2657 1671,2712 1685,2712 ; v1(1520,2209) 1685,2209 ; 4108,2209 4429,2209 4537,2317 v1(7327,2317) 7983,2317 v1(8061,2395)
DI_DO_SER: U1.10 U11.9 | length 1419.5
  Top Layer w15: U1.10 7733,1620 v1(7734,1619) ; v1(8393,1621) 8393,2218.78 U11.9
  Bottom Layer w15: v1(7734,1619) 8391,1619 v1(8393,1621)
DO0: EC1.36 U3.15 U11.11 | length 5809
  Top Layer w15: EC1.36 6005,550 6094,639 6094,747 v2(6086,755) ; v2(6955,755) v2(6955,2663) ; U3.15 7679.44,3208 7765,3208 7794,3179 v2(7794,2662) ; U11.11 8581,2393 8583,2395 8583,2675 v1(8582,2676)
  Bottom Layer w15: v2(6086,755) v2(6955,755) ; v2(6955,2663) 7793,2663 7806,2676 v1(8582,2676)
DO1: EC1.35 U3.1 U11.12 | length 6500.1
  Top Layer w15: EC1.35 5880,525 5940,585 5940,675 v2(5975,710) ; v2(6910,710) v1(6910,2749) 6910,3225 6945,3260 U3.1 ; U11.12 8528,2443 v1(8530,2445) ; v1(8624,2751) 8624,2447 v1(8626,2445)
  Bottom Layer w15: v2(5975,710) v2(6910,710) ; v1(6910,2749) 8622,2749 v1(8624,2751) ; v1(8530,2445) v1(8626,2445)
DO2: EC1.88 U3.2 U11.13 | length 6046.2
  Top Layer w15: v1(6255,647) v1(6255,1204) ; v1(6993,1205) v1(6993,2714) 6993,3160 7043,3210 U3.2 ; U11.13 8468.22,2492 v1(8528,2492) ; v1(8669,2495) v1(8669,2714)
  Bottom Layer w15: EC1.88 v1(6255,647) ; v1(6255,1204) 6992,1204 v1(6993,1205) ; v1(6993,2714) 8664,2714 8666,2712 8668,2714 v1(8669,2714) ; v1(8528,2492) 8672,2492 v1(8669,2495)
DO3: EC1.89 U3.3 U11.14 | length 6550.5
  Top Layer w15: v1(6337,1283) 6336,1282 6336,679 v1(6380,635) ; v1(7031,1283) v1(7031,2582) 7031,3131 7060,3160 U3.3 ; v1(8018,2588) 8018,2172 v1(8020,2170) ; U11.14 8525,2543 v1(8527,2545) ; v1(8709,2171) v1(8709,2539)
  Bottom Layer w15: v1(6337,1283) v1(7031,1283) ; EC1.89 v1(6380,635) ; v1(7031,2582) 8012,2582 v1(8018,2588) ; v1(8020,2170) 8708,2170 v1(8709,2171) ; v1(8527,2545) 8703,2545 v1(8709,2539)
DO4: EC1.38 U3.4 U11.3 | length 5005.1
  Top Layer w15: EC1.38 6255,565 6299,609 v1(6299,1243) ; v1(7073,1244) 7073,1250 7072,1251 7073,1252 v1(7073,2543) 7073,3069 7072,3070 7112,3110 U3.4 ; v1(8161,2544) 8243.78,2544 U11.3
  Bottom Layer w15: v1(6299,1243) v1@7081,1243 ; v1(7073,2543) 7077,2547 8150,2547 8153,2544 v1(8161,2544)
DO5: EC1.39 U3.5 U11.4 | length 4800.5
  Top Layer w15: EC1.39 6380,562 6426,608 6426,1323 v1(6423,1326) ; v1(7113,1323) 7107.8,1328.2 v1(7107.8,2491) 7107.8,3023.8 7144,3060 U3.5 ; v1(8162,2493) U11.4
  Bottom Layer w15: v1(6423,1326) 6426,1323 v1(7113,1323) ; v1(7107.8,2491) 7109.8,2493 v1(8162,2493)
DO6: EC1.40 U3.6 U11.5 | length 4656.6
  Top Layer w15: v1(6469,1367) 6469,623 6505,587 EC1.40 ; v1(7149,1366) v1(7149,2445) 7149,2989 7170,3010 U3.6 ; v1(8160,2444) 8243.78,2444 U11.5
  Bottom Layer w15: v1(6469,1367) 6470,1366 v1(7149,1366) ; v1(7149,2445) 8159,2445 v1(8160,2444)
DO7: EC1.90 U3.7 U11.6 | length 4626.3
  Top Layer w15: v1(6509,651) 6509,1415 v1(6510,1416) ; v1(7191,1415) 7191,2257 ; v1(7280,2256) 7279,2257 7191,2257 ; U3.7 7210,2960 7191,2941 7191,2257 ; v1(8102,2260) 8102,2359 8136,2393 U11.6
  Bottom Layer w15: EC1.90 6505,647 v1(6509,651) ; v1(6510,1416) 7190,1416 v1(7191,1415) ; v1(7280,2256) 8098,2256 v1(8102,2260)
DO_RCLK: U2.17 U3.12 | length 6809.6
  Top Layer w8: U2.17 3202.47,2710.47 v1(3212,2720) ; 4005,3502 4005,2763 v1(4006,2762)
  Top Layer w15: 4005,3502 v1(4005,3662) ; U3.12 v1(7738,3060)
  Bottom Layer w8: v1(3212,2720) 3217,2725 3901,2725 3938,2762 v1(4006,2762)
  Bottom Layer w15: v1(4005,3662) 4008,3665 7817,3665 7938,3544 7938,3167 7831,3060 v1(7738,3060)
DO_SER: U2.15 U3.14 | length 6521.9
  Top Layer w8: U2.15 3226.9,2671.1 3243,2655 v1(3306,2655) ; v1(3945,2655) 3986,2655 4060,2729 4060,3502
  Top Layer w15: 4060,3502 v1(4060,3590) ; U3.14 7737,3160 v1(7738,3159)
  Bottom Layer w8: v1(3306,2655) v1(3945,2655)
  Bottom Layer w15: v1(4060,3590) 4065,3595 7794,3595 7839,3550 7839,3167 7831,3159 v1(7738,3159)
DO_SRCLK: U2.16 U3.11 | length 7018.3
  Top Layer w8: U2.16 2785.24,2690 v1(3263,2690) ; 3968,3502 3968,2718 v1(3970,2716)
  Top Layer w15: 3968,3502 v1(3968,3701) ; U3.11 v1(7737,3010)
  Bottom Layer w8: v1(3263,2690) 3944,2690 v1(3970,2716)
  Bottom Layer w15: v1(3968,3701) 3968.64,3700.36 7828.64,3700.36 7988,3541 7988,3167 7831,3010 v1(7737,3010)
GND: C1.2 C2.2 C3.2 C4.2 C5.2 C6.2 C7.2 C8.2 C9.2 C10.2 C11.2 C12.2 C13.2 EC1.20 EC1.50 EC1.53 EC1.70 EC1.100 J1.4 J2.5 LED1.2 LED2.2 LED3.2 LED4.2 LED5.2 LED6.2 P2.1 R5.1 SW1.2 U1.8 U1.15 U2.8 U2.23 U2.35 U2.47 U3.8 U4.8 U5.8 U6.8 U6.15 U7.2 U8.8 U8.15 U9.1 U10.1 U11.8 U11.15 | length 21983.2
  Top Layer w8: C6.2 2226,2422 2204,2444 2204,2616 2239.42,2651.42 U2.47 ; C3.2 2302,3103 2323,3124 2507,3124 2536.42,3094.58 U2.35 ; U2.8 2654,2580.02 2654,2020 2668,2006 2765,2006 2771,2012 2771,2070 C4.2 ; U2.23 2972.58,2828.58 3043,2899 C5.2
  Top Layer w10: U10.1 1531.22,3890 C9.2
  Top Layer w15: P2.1 2485,5382 2535,5432 3638,5432 3640,5430 3825,5430 R5.1 ; v1(4949,857) 4947,859 4950,862 v1(4950,1533) ; U4.8 5468.78,2628.22 v1(5472,2625) v1(5472,2136) 5636,2136 5636,1870 U6.15 ; v1(5469,1518) 5468.78,1518.22 U6.8 5549,1570 v1(5550,1571) ; v1(6249,1572) 6341.78,1572 U8.8 6374,1570 6453,1649 6453,1866 6562.22,1866 U8.15 ; v1(6340,2626) 6340,2906.22 U5.8 ; v1(7384,1570) U1.8 7549,1570 7581,1602 7581,1869 ; U3.8 7455,2626 v1(7457,2624) ; v1(7556,2622) 7556,1894 7581,1869 ; U1.15 7582,1870 7581,1869 ; U11.8 8309,2293 8368,2352 8368,2567 ; v1(8372,2639) 8368,2635 8368,2567 ; U11.15 8394,2593 8368,2567
  Top Layer w30: 4852,5267 4855,5270 LED1.2 ; EC1.50 7775,591.6 7840,656.6 8310.6,656.6 8317,663
  Bottom Layer w15: 4005,745 4005,812 4050,857 v1(4949,857) ; 4832,2139 4835,2136 v1(5472,2136) ; v1(4950,1533) 4968,1533 4983,1518 v1(5469,1518) ; v1(5472,2625) 6339,2625 v1(6340,2626) 6342,2624 v1(7457,2624) 8357,2624 v1(8372,2639) ; v1(5550,1571) 6248,1571 v1(6249,1572) 6251,1570 v1(7384,1570)
  Bottom Layer w30: U7.2 550,837 642,745 1877,745 ; EC1.53 1880,742 1877,745 ; EC1.70 4005,745 1877,745 ; LED1.2 4945,5480 5555,5480 LED4.2 ; LED2.2 5118.33,5476 ; LED3.2 5381.67,5464
M1: EC1.44
MCU_RX: LED7.2 U2.31 U10.2 | length 3330.8
  Top Layer w8: U10.2@1413,3958.22 U10.2 ; v1@1670,4061 v1(1672,4063) ; v1(2591,3331) 2591,3322.25 2615.16,3298.09 U2.31
  Top Layer w15: U10.2@1413,3958.22 v1(1413,4061) v1@1670,4061
  Bottom Layer w8: 1762,3502 1762,3438.16 1810.16,3390 2532,3390 v1(2591,3331)
  Bottom Layer w15: LED7.2 1380,4525 1413,4492 v1(1413,4061) ; v1(1672,4063) 1672,4065.84 1762,3975.84 1762,3502
MCU_TX: LED8.2 U2.30 U10.3 | length 3098.4
  Top Layer w8: U10.3 U10.3@1367,3958.22 ; v1(1366,4170) 1367,4169 1367,4137.5 ; v1(2629,3356) 2634.84,3350.16 U2.30
  Top Layer w15: U10.3@1367,3958.22 1367,4137.5 v1(1671,4137.5)
  Bottom Layer w8: 1794,3503 1794,3446 1827,3413 2569.75,3413 v1@2626.75,3356
  Bottom Layer w15: LED8.2 880,4170 v1(1366,4170) ; v1(1671,4137.5) 1692.5,4137.5 1794,4036 1794,3503 ; v1@2626.75,3356 v1(2629,3356)
MEMR: EC1.47 U2.26 | length 11010.9
  Top Layer w8: U2.26 2713.58,3260.58 2775,3322 2775,3502
  Top Layer w15: 2775,3502 2775,3765.27 2803.73,3794 v1(2813,3794) ; EC1.47 7380,615 7407,642 7536,642 7565,671 7565,932 7655,1022 7829,1022 v1(7830,1023)
  Bottom Layer w15: v1(2813,3794) 3996.32,3794 4058.32,3732 8010,3732 8848,2894 8848,1320 8551,1023 v1(7830,1023)
NetC1_1: C1.1 U2.5 Y1.2 | length 1094.2
  Top Layer w8: C1.1 2400.73,1878.99 2394.72,1885 Y1.2 2562,1885 2595.47,1918.47 U2.5
NetC2_1: C2.1 U2.6 Y1.1 | length 1051.5
  Top Layer w8: U2.6 2615.16,1916.84 2647,1885 2768.74,1885 Y1.1@2781.73,1872.01 ; C2.1 Y1.1@2800.73,1872.01
NetC12_1: C12.1 U10.7 Y2.1 | length 649.5
  Top Layer w15: C12.1 Y2.1 1123,3835 1165,3877 U10.7
NetC13_1: C13.1 U10.8 Y2.2 | length 784.5
  Top Layer w15: C13.1 Y2.2 610,3902 664.22,3956.22 U10.8
NetD1_1: D1.1 J1.1 | length 366.6
  Bottom Layer w12: D1.1 J1.1
NetD2_1: D2.1 J2.1 | length 195
  Bottom Layer w12: D2.1 J2.1
NetLED1_1: LED1.1 R1.2 | length 265
  Top Layer w30: R1.2 LED1.1
NetLED2_1: LED2.1 R2.2 | length 265.9
  Top Layer w30: R2.2 5019,5125 5019,5191.33 5018.33,5192 LED2.1
NetLED3_1: LED3.1 R3.1 | length 265.5
  Top Layer w30: R3.1 5282,5125 5282,5191.67 5281.67,5192 LED3.1
NetLED4_1: LED4.1 R4.2 | length 265
  Top Layer w30: R4.2 LED4.1
NetLED5_1: LED5.1 R7.1 | length 145.3
  Top Layer w15: LED5.1 R7.1
NetLED6_1: LED6.1 R8.2 | length 175.2
  Top Layer w15: LED6.1 R8.2
NetLED7_1: LED7.1 R9.1 | length 185
  Top Layer w15: R9.1 LED7.1
NetLED8_1: LED8.1 R10.1 | length 185
  Top Layer w15: R10.1 LED8.1
NetP1_1: P1.1 R5.2 U2.44 | length 5557.3
  Top Layer w8: v1@1881,4590 v1(1885,4594) ; 1885,3502 1885,2639 1902,2622 1950.41,2622 2038.88,2710.47 U2.44
  Top Layer w15: 1885,3502 v1(1885,4594) ; v1(3866,4594) 3865,4595 R5.2 P1.1
  Bottom Layer w15: v1(1885,4594) v1(3866,4594)
NetR1_1: R1.1 U2.18 | length 4266.4
  Top Layer w8: U2.18 3156.16,2730.16 3186,2760 v1(3338,2760) ; v1(3832,2759) 3832,3502
  Top Layer w15: 3832,3502 v1(3832,3918) ; v1(4750,3918) 4750,5040 R1.1
  Bottom Layer w8: v1(3338,2760) 3831,2760 v1(3832,2759)
  Bottom Layer w15: v1(3832,3918) v1(4750,3918)
NetR2_1: R2.1 U2.19 | length 4495.4
  Top Layer w8: U2.19 3127.84,2749.84 v1(3170,2792) ; v1(3926,2799) 3926,4921 v1(3928,4923) ; v1(5015,4926) 5015,5041.67 R2.1
  Bottom Layer w8: v1(3170,2792) 3919,2792 v1(3926,2799) ; v1(3928,4923) 5012,4923 v1(5015,4926)
NetR3_2: R3.2 U2.38 | length 5939.7
  Top Layer w8: 2004,3502 2004,2854 2029.42,2828.58 U2.38
  Top Layer w15: v1(2003,4527) 2004,4526 2004,3502 ; R3.2 5282,5044.67 v1(5282,4532)
  Bottom Layer w15: v1(2003,4527) 5277,4527 v1(5282,4532)
NetR4_1: R4.1 U2.10 | length 5673.8
  Top Layer w8: U2.10 2693.9,2353.1 2720,2327 2797,2327 v1(2799,2329)
  Top Layer w15: v1(4935,2469) 4935,3988 4982,4035 5506,4035 5545,4074 R4.1
  Bottom Layer w8: v1(2799,2329) 4108,2329
  Bottom Layer w15: 4108,2329 4392,2329 4532,2469 v1(4935,2469)
NetU4_9: U4.9 U5.14 | length 1190.2
  Top Layer w15: U4.9 v1(5760,2910) ; v1(6484,3161) 6565.22,3161 U5.14
  Bottom Layer w15: v1(5760,2910) 5857,2910 5939,2828 6395,2828 6468,2901 6468,3145 v1(6484,3161)
NetU6_9: U6.9 U8.10 | length 1251.5
  Top Layer w15: U6.9 5747.22,1514 v1(5763,1514) ; U8.10 6689,1620 6693,1616 6693,1531 v1(6696,1528)
  Bottom Layer w15: v1(5763,1514) 6682,1514 v1(6696,1528)
p_WRT: EC1.77 U2.25 | length 5028.9
  Top Layer w8: U2.25 2733.27,3089.27 v1(2776,3132)
  Top Layer w15: v1(4851,3130) 4851,793 v1(4881,763)
  Bottom Layer w8: v1(2776,3132) 4108,3132
  Bottom Layer w15: 4108,3132 4849,3132 v1(4851,3130) ; EC1.77 4881,441 v1(4881,763)
SINP: EC1.46 U2.28 | length 11361.1
  Top Layer w8: U2.28 2674.21,3289.21 2708,3323 2708,3516
  Top Layer w15: v1(2707,3852) 2708,3851 2708,3516 ; EC1.46 7255,729 v1(7375,849) ; v1(7679,852) 7771,944 7893,944 v1(7894,943)
  Bottom Layer w15: v1(2707,3852) 2722,3867 4011,3867 4084,3794 8015.53,3794 8910,2899.53 8910,1294.32 8576.68,961 7926,961 7908,943 v1(7894,943) ; v1(7375,849) 7378,852 v1(7679,852)
SOUT: EC1.45 U2.27 | length 11324.5
  Top Layer w8: U2.27 2693.9,3269.9 2747,3323 2747,3502
  Top Layer w15: 2747,3502 v1(2747,3810) ; EC1.45 7130,568 7177,615 7177,723 7366,912 v1(7366,935)
  Bottom Layer w15: v1(2747,3810) 2750,3810 2780,3840 3999.82,3840 4072.82,3767 8010,3767 8883,2894 8883,1305.5 8565.5,988 7730,988 7694,952 7383,952 v1(7366,935)
SWCLK: P2.2 U2.37 | length 2524.5
  Top Layer w8: v1(2465,3164) 2456,3173 2456,5034 2585,5163 P2.2 ; U2.37 2465.55,2946.55 v1(2466,2947)
  Bottom Layer w8: v1(2465,3164) 2466,3163 v1(2466,2947)
SWDIO: P2.3 U2.34 | length 2532
  Top Layer w8: U2.34 2556.1,3207.9 2480,3284 2480,5024 2685,5229 P2.3
USB_DM: J1.2 J2.2 U10.6 | length 2895.8
  Top Layer w12: J1.2 910,5329 ; U10.6 1215,4395 724,4886 724,5143 910,5329 ; J2.2 1791.89,5365.11 1763,5394 975,5394 910,5329
USB_DP: J1.3 J2.3 U10.5 | length 2418.2
  Top Layer w12: U10.5 1265,4422 910,4777 J1.3 993,5020.05 993,5297 1055,5359 1317,5359 1486,5190 1694.33,5190 J2.3
XRDY: EC1.3 U2.32 | length 4329.7
  Top Layer w8: v1(1851,3467) 1851,3433 1851,1453 1880,1424 ; v1(2562,3464) 2562,3293 2595.47,3259.53 U2.32
  Top Layer w30: EC1.3 1880,1424
  Bottom Layer w8: v1(1851,3467) 2559,3467 v1(2562,3464)
pads on no net: EC1.2 EC1.4 EC1.5 EC1.6 EC1.7 EC1.8 EC1.9 EC1.10 EC1.11 EC1.12 EC1.13 EC1.14 EC1.15 EC1.16 EC1.17 EC1.21 EC1.24 EC1.25 EC1.26 EC1.27 EC1.28 EC1.48 EC1.49 EC1.52 EC1.54 EC1.55 EC1.56 EC1.57 EC1.58 EC1.59 EC1.60 EC1.61 EC1.62 EC1.63 EC1.64 EC1.65 EC1.66 EC1.67 EC1.68 EC1.69 EC1.71 EC1.72 EC1.74 EC1.75 EC1.76 EC1.78 EC1.96 EC1.97 EC1.98 EC1.99 J1.5 J2.4 J2.6 U1.7 U2.1 U2.2 U2.3 U2.4 U3.9 U5.9 U6.7 U6.10 U7.None U8.7 U9.4 U10.9 U10.10 U10.11 U10.12 U10.13 U10.14 U10.15 U11.7 U11.10

## Polygon pours and split planes (outlines as drawn)
GND on Top Layer "GND_L01_P000" (solid, pour order 0): 0,5313 5,5318 9999,5318 9999,571 10000,570 0,570
GND on Bottom Layer "Top Layer-GND" (solid, pour order 2): 0,5313 5,5318 9999,5318 9999,571 10000,570 0,570

## Silkscreen, mask and mechanical layers (free items; w line width, h text height)
Mechanical 1:
  the board outline again, w10

## Text inside footprints (layer, text, board x,y; h text height)
U7: Mechanical 4 "1" at 424.76,1195.16 h73.82; Mechanical 4 "2" at 524.96,1195.16 h73.82; Mechanical 4 "3" at 625.02,1195.16 h73.82; Mechanical 4 "1" at 424.76,1195.16 h73.82; Mechanical 4 "2" at 524.96,1195.16 h73.82; Mechanical 4 "3" at 625.02,1195.16 h73.82